# EAGLE board source_eagle (EAGLE 9.6.2)
REV: A
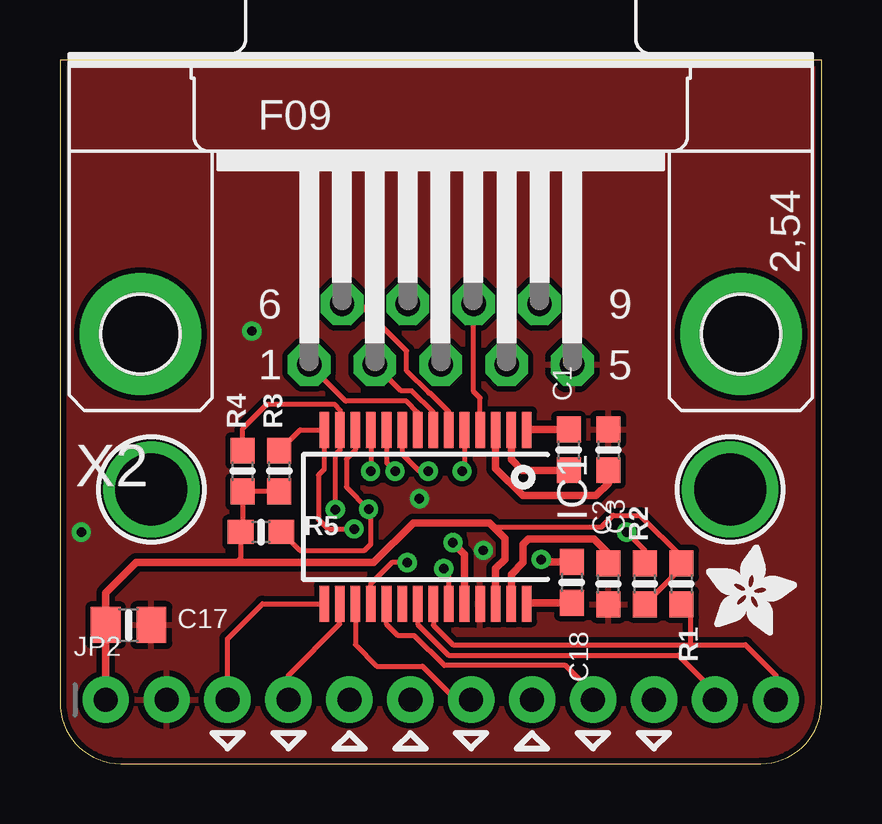
[diagram p0: board, top side]
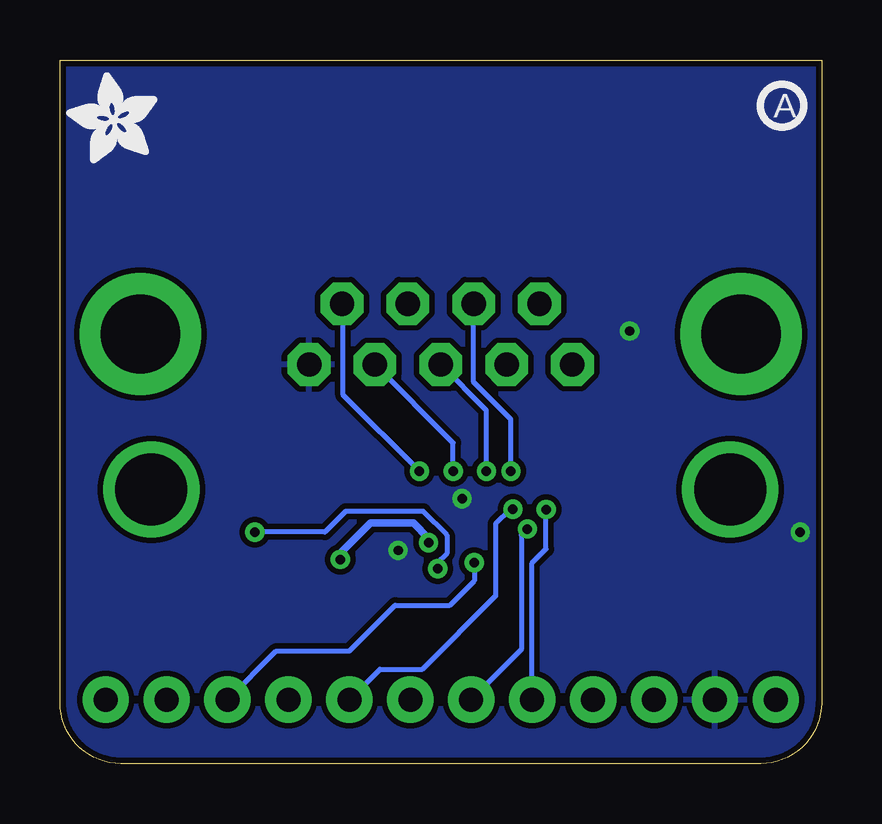
[diagram p1: board, bottom side, seen from below]

Size 31.75 x 29.34 mm. Coordinates in mm from the lower left corner, seen from the top.
Outline: 31.75,2.54 31.75,29.34 0,29.34 0,2.54 arc90 2.54,0 29.21,0 arc90 31.75,2.54
Copper layers (1*16): Top 0.035mm / dielectric 1.5mm / Bottom 0.035mm
Design rules "adafruit *": minimum track width 8mil, minimum drill 15.5mil, track to track 9mil, track to pad 8mil, pad to pad 8mil, via to via 8mil, smd to smd 8mil, copper to edge 10mil, drill to drill 8mil, minimum pad ring 10mil, minimum via ring 8mil, stop-mask expansion 2mil, vias tented up to drill 20mil, thermal gap 10mil
Net classes: 1 power: width 0.254 mm; 2 gnd: width 0.254 mm

## Footprints (pad centres in the part's own frame; a part is rotated, then mirrored left to right if it is on the bottom)
0603-NO = smd 1.075 x 1: 1 -0.85,0; 2 0.85,0
0805-NO = smd 1.24 x 1.5: 1 -0.95,0; 2 0.95,0
SSOP28 = smd 0.4 x 1.5: 1 -4.225,-3.625; 2 -3.575,-3.625; 3 -2.925,-3.625; 4 -2.275,-3.625; 5 -1.625,-3.625; 6 -0.975,-3.625; 7 -0.325,-3.625; 8 0.325,-3.625; 9 0.975,-3.625; 10 1.625,-3.625; 11 2.275,-3.625; 12 2.925,-3.625; 13 3.575,-3.625; 14 4.225,-3.625; 15 4.225,3.625; 16 3.575,3.625; 17 2.925,3.625; 18 2.275,3.625; 19 1.625,3.625; 20 0.975,3.625; 21 0.325,3.625; 22 -0.325,3.625; 23 -0.975,3.625; 24 -1.625,3.625; 25 -2.275,3.625; 26 -2.925,3.625; 27 -3.575,3.625; 28 -4.225,3.625
1X12_ROUND_76MIL = drill 1 pad 1.93: 1 -13.97,0; 2 -11.43,0; 3 -8.89,0; 4 -6.35,0; 5 -3.81,0; 6 -1.27,0; 7 1.27,0; 8 3.81,0; 9 6.35,0; 10 8.89,0; 11 11.43,0; 12 13.97,0
MOUNTINGHOLE_3.0_PLATEDTHIN = drill 3 pad 3.6: P$1 0,0
F09HP = drill 1.016 pad 1.778 octagon: 1 -5.486,-1.27; 2 -2.743,-1.27; 3 0,-1.27; 4 2.743,-1.27; 5 5.486,-1.27; 6 -4.115,1.27; 7 -1.372,1.27; 8 1.372,1.27; 9 4.115,1.27 | drill 3.302 pad 5.08: G1 -12.522,0; G2 12.522,0

## Placement (x,y rotation side)
C1  1uF  [0603-NO]  21.21,13.08 90 top
C2  1uF  [0603-NO]  22.86,7.49 90 top
C3  1uF  [0603-NO]  22.86,13.08 270 top
C17  10uF  [0805-NO]  2.86,5.78 0 top
C18  1uF  [0603-NO]  21.34,7.56 270 top
IC1  MAX3243CAI  [SSOP28]  15.24,10.29 180 top
JP2  [1X12_ROUND_76MIL]  15.88,2.67 0 top
PLABEL0  [PLABEL0]  1.91,4.32 0 top
PLABEL1  [PLABEL1]  4.45,0.89 0 top
PLABEL2  [PLABEL2]  6.86,4.32 0 top
PLABEL3  [PLABEL3]  9.65,5.08 0 top
PLABEL4  [PLABEL4]  12.06,4.32 0 top
PLABEL5  [PLABEL5]  14.48,5.08 0 top
PLABEL6  [PLABEL6]  27.3,4.32 0 top
PLABEL7  [PLABEL7]  17.27,4.32 0 top
PLABEL8  [PLABEL8]  19.94,5.21 0 top
PLABEL9  [PLABEL9]  22.23,4.32 0 top
PLABEL10  [PLABEL10]  24.89,4.32 0 top
PLABEL11  [PLABEL11]  30.35,4.32 0 top
PLABEL12  [PLABEL12]  0,7.11 0 top
PLABEL13  [PLABEL13]  15.75,24.13 0 bottom
PLABEL14  [PLABEL14]  15.88,12.95 0 bottom
PLABEL15  [PLABEL15]  15.49,6.35 0 bottom
R1  10K  [0603-NO]  25.91,7.49 270 top
R2  10K  [0603-NO]  24.38,7.49 90 top
R3  10K  [0603-NO]  9.14,12.19 90 top
R4  10K  [0603-NO]  7.62,12.19 90 top
R5  10K  [0603-NO]  8.38,9.65 0 top
U$2  MOUNTINGHOLE3.0THIN  [MOUNTINGHOLE_3.0_PLATEDTHIN]  3.81,11.43 0 top
U$3  MOUNTINGHOLE3.0THIN  [MOUNTINGHOLE_3.0_PLATEDTHIN]  27.94,11.43 0 top
U$5  [PCBFEAT-REV-040]  1.65,27.43 0 bottom
U$8  [ADAFRUIT_3.5MM]  27.69,25.02 90 bottom
U$9  [ADAFRUIT_3.5MM]  26.92,5.33 0 top
X2  DE9-F  [F09HP]  15.88,17.91 0 top

## Library data of the parts
C1-C3 C17 C18 JP2 R1-R5 U$8 U$9 = microbuilder
IC1 = maxim; MF: MAXIM; MPN: MAX3243CAI+; OC_FARNELL: 1379933; OC_NEWARK: 59K9409
PLABEL0 PLABEL1-PLABEL15 = pinguin
U$2 U$3 = microbuilder; BOM: EXCLUDE
U$5 = microbuilder; REV: A
X2 = adafruit_electromech; FORCETHM: 1; OC_FARNELL: unknown; OC_NEWARK: unknown; ROT: 90

## Nets
!FORCEOFF: IC1.22 JP2.12 R1.2
!INVALID: IC1.21 JP2.11
CTS: IC1.19 JP2.9
DCD: IC1.15 JP2.3
DSR: IC1.17 JP2.7
DTR: IC1.14 JP2.6 R3.2
FORCEON: IC1.23 R2.2
GND [gnd]: C2.1 C3.1 C17.2 IC1.25 JP2.2 X2.5
N$1: C18.2 IC1.28
N$2: C18.1 IC1.24
N$3: C1.1 IC1.2
N$4: C1.2 IC1.1
RI: IC1.18 JP2.10
RS_CTS: IC1.4 X2.8
RS_DCD: IC1.8 X2.1
RS_DSR: IC1.6 X2.6
RS_DTR: IC1.9 X2.4
RS_RI: IC1.5 X2.9
RS_RTS: IC1.11 X2.7
RS_RXD: IC1.7 X2.2
RS_TXD: IC1.10 X2.3
RTS: IC1.12 JP2.8 R5.2
RXD: IC1.16 JP2.4
TXD: IC1.13 JP2.5 R4.2
V+: C2.2 IC1.27
V-: C3.2 IC1.3
VCC: C17.1 IC1.26 JP2.1 R1.1 R2.1 R3.1 R4.1 R5.1

## Tracks (layer width: path | path; a pad name or v marks a point on that pad's centre or on a via)
!FORCEOFF
  Top 0.203: IC1.22 15.56,5.77 16.38,4.95 26.29,4.95 | 26.29,4.95 28.57,4.95 29.84,3.68 JP2.12 | R1.2 26.29,6.26 26.29,4.95
!INVALID
  Top 0.203: IC1.21 14.91,5.81 16.2,4.52 25.78,4.52 27.3,3 JP2.11
CTS
  Top 0.203: JP2.9 22.23,2.95 21.08,4.09 16.02,4.09 14.78,5.33 14.1,5.33 13.62,5.82 IC1.19
DCD
  Top 0.203: JP2.3 6.99,5.21 8.44,6.66 IC1.15
DSR
  Top 0.203: IC1.17 12.31,4.96 13.21,4.06 15.11,4.06 16.51,2.67 JP2.7
DTR  (via drill 0.39)
  Top 0.203: v12.26,9.78 11.17,9.78 10.78,10.18 10.78,12.03 11.02,12.27 IC1.14 10.01,13.91 R3.2
  Bottom 0.203: v12.26,9.78 12.52,9.53 12.52,4.76 JP2.6
FORCEON  (via drill 0.39)
  Top 0.203: IC1.23 16.21,7.92 v16,8.13 | v23.62,9.65 24.38,8.89 R2.2
  Bottom 0.203: v16,8.13 16,8.38 15.62,8.76 15.62,9.53 16.61,10.52 19.84,10.52 20.7,9.65 v23.62,9.65
GND  (via drill 0.39)
  other vias: 17.65,8.89 14.99,11.05 0.89,9.65 8,18.03
  pour Bottom: 0,29.34 31.75,29.34 31.75,0 0,0
  pour Top: 0,29.34 31.75,29.34 31.75,0 0,0
N$1
  Top 0.305: IC1.28 19.51,6.71 C18.2
N$2  (via drill 0.39)
  Top 0.305: v20.07,8.51 20.07,8.41 C18.1 | IC1.24 16.86,8.73 v16.38,9.21
  Bottom 0.305: v16.38,9.21 16.38,9.4 17.02,10.03 18.8,10.03 20.07,8.76 v20.07,8.51
N$3
  Top 0.305: IC1.2 18.82,12.68 19.27,12.23 C1.1
N$4
  Top 0.305: IC1.1 19.48,13.93 C1.2
RI  (via drill 0.39)
  Top 0.203: v14.48,8.38 13.84,8.38 12.96,7.5 IC1.18
  Bottom 0.203: v14.48,8.38 14.48,7.62 15.49,6.6 17.78,6.6 19.68,4.7 22.73,4.7 JP2.10
RS_CTS
  Top 0.203: IC1.4 17.52,15.25 17.25,15.52 X2.8
RS_DCD
  Top 0.203: X2.1 11.91,15.11 14.45,15.11 14.91,14.64 14.91,14.55 IC1.8
RS_DSR
  Top 0.203: IC1.6 16.21,14.66 15.43,15.44 15.38,15.44 14.45,16.37 14.45,17.21 12.48,19.18 X2.6
RS_DTR  (via drill 0.39)
  Top 0.203: IC1.9 14.27,12.9 14.97,12.19 v15.35,12.19
  Bottom 0.203: v15.35,12.19 15.35,13.37 X2.4
RS_RI  (via drill 0.39)
  Top 0.203: IC1.5 16.86,12.29 v16.76,12.19
  Bottom 0.203: v16.76,12.19 19.94,15.37 19.94,19.13 X2.9
RS_RTS  (via drill 0.39)
  Top 0.203: IC1.11 12.96,12.2 v12.95,12.19
  Bottom 0.203: v12.95,12.19 12.95,14.35 14.5,15.9 X2.7
RS_RXD
  Top 0.203: X2.2 14.22,15.54 14.66,15.54 15.56,14.64 IC1.7
RS_TXD  (via drill 0.39)
  Top 0.203: IC1.10 13.62,12.55 v13.97,12.19
  Bottom 0.203: v13.97,12.19 13.97,14.73 X2.3
RTS  (via drill 0.39)
  Top 0.203: IC1.12 12.31,13.08 11.94,12.7 11.94,11.54 v12.87,10.61 12.97,10.51 12.97,9.16 12.7,8.89 9.99,8.89 R5.2
  Bottom 0.203: JP2.8 18.41,3.94 16.64,3.94 13.59,6.99 13.59,10.01 12.99,10.61 v12.87,10.61
RXD
  Top 0.203: IC1.16 11.66,5.82 9.53,3.68 JP2.4
TXD  (via drill 0.39)
  Top 0.203: v11.48,10.59 11.48,12.88 11.68,13.08 11.68,13.89 IC1.13 11.68,13.93 11.68,14.73 11.43,14.99 8.64,14.99 7.62,13.97 R4.2
  Bottom 0.203: JP2.5 12.06,8.36 11.48,8.94 v11.48,10.59
V+
  Top 0.305: IC1.27 18.82,7.89 19.3,8.38 19.3,9.14 19.53,9.37 22.25,9.37 22.86,8.76 C2.2
V-
  Top 0.305: IC1.3 18.16,12.31 19.3,11.18 22.35,11.18 22.86,11.68 C3.2
VCC
  Top 0.203: R3.1 R4.1 7.62,9.74 R5.1 7.53,8.55 7.37,8.38 | 18.09,9.86 22.55,9.86 23.06,10.36 24.19,10.36 25.91,8.64 R1.1 25.91,8.17 R2.1
  Top 0.305: JP2.1 1.91,5.58 C17.1 1.91,7.11 3.17,8.38 7.37,8.38 13.08,8.38 14.73,10.03 17.91,10.03 18.09,9.86 18.54,9.4 18.54,8.51 18.16,8.13 IC1.26

## Text on the board
Pinguin_tBackup: MAX3243 | RX | DTR | RTS | Vin | DCD | TX | DSR | CTS | RI | VLD | OFF | GND
Pinguin_bBackup: DE-9 Pinout: 1)DCD / 2)RXI 3)TXO 4)DTR 5)GND / 6)DSR 7)RTS 8)CTS 9)RING | MAX3243 Full RS-232 / Line Transceiver | Vin/Vlogic: 3.3~5VDC